# Altium PCB Camera-MT_Pcb.PcbDoc
Units mil, origin at the board's own origin, x right, y up, seen from the top; angles counter-clockwise.
Board outline 860 x 1080 mil, 2 copper layers (Top Layer, Bottom Layer); 19 components, 29 nets, 100 pads, 34 vias.
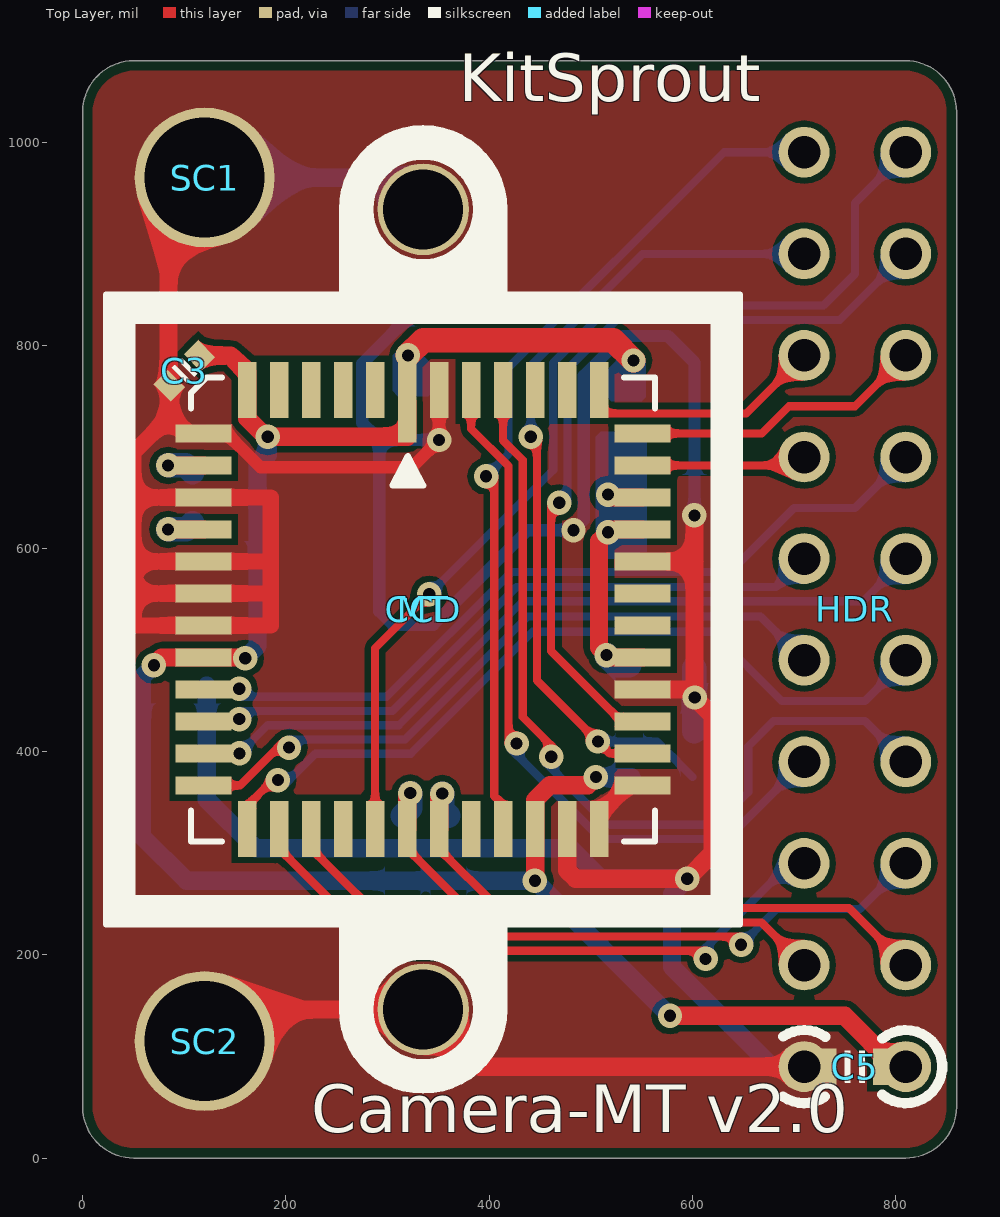
[diagram p0: Top Layer view]
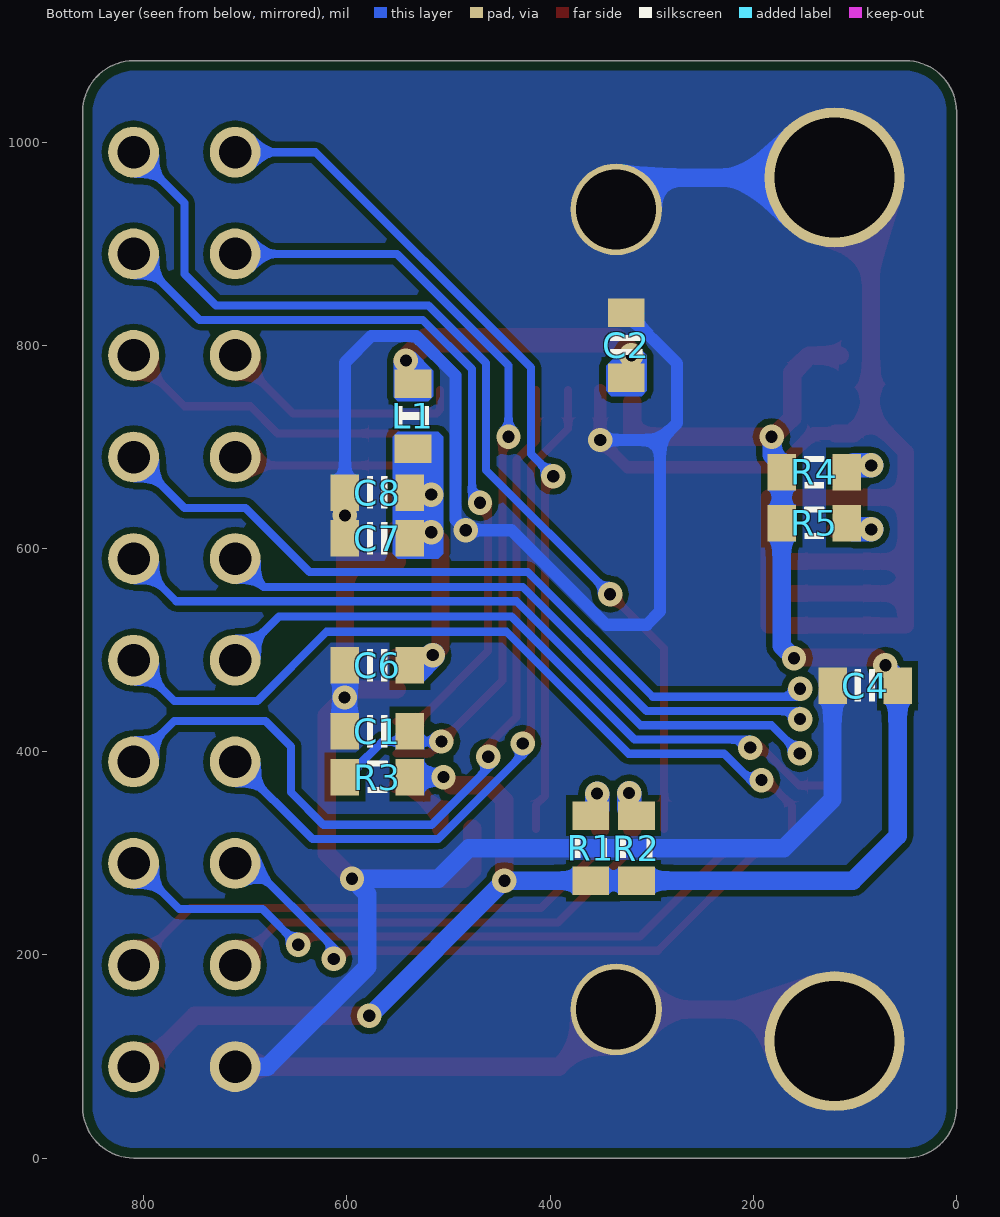
[diagram p1: Bottom Layer view, seen from below]
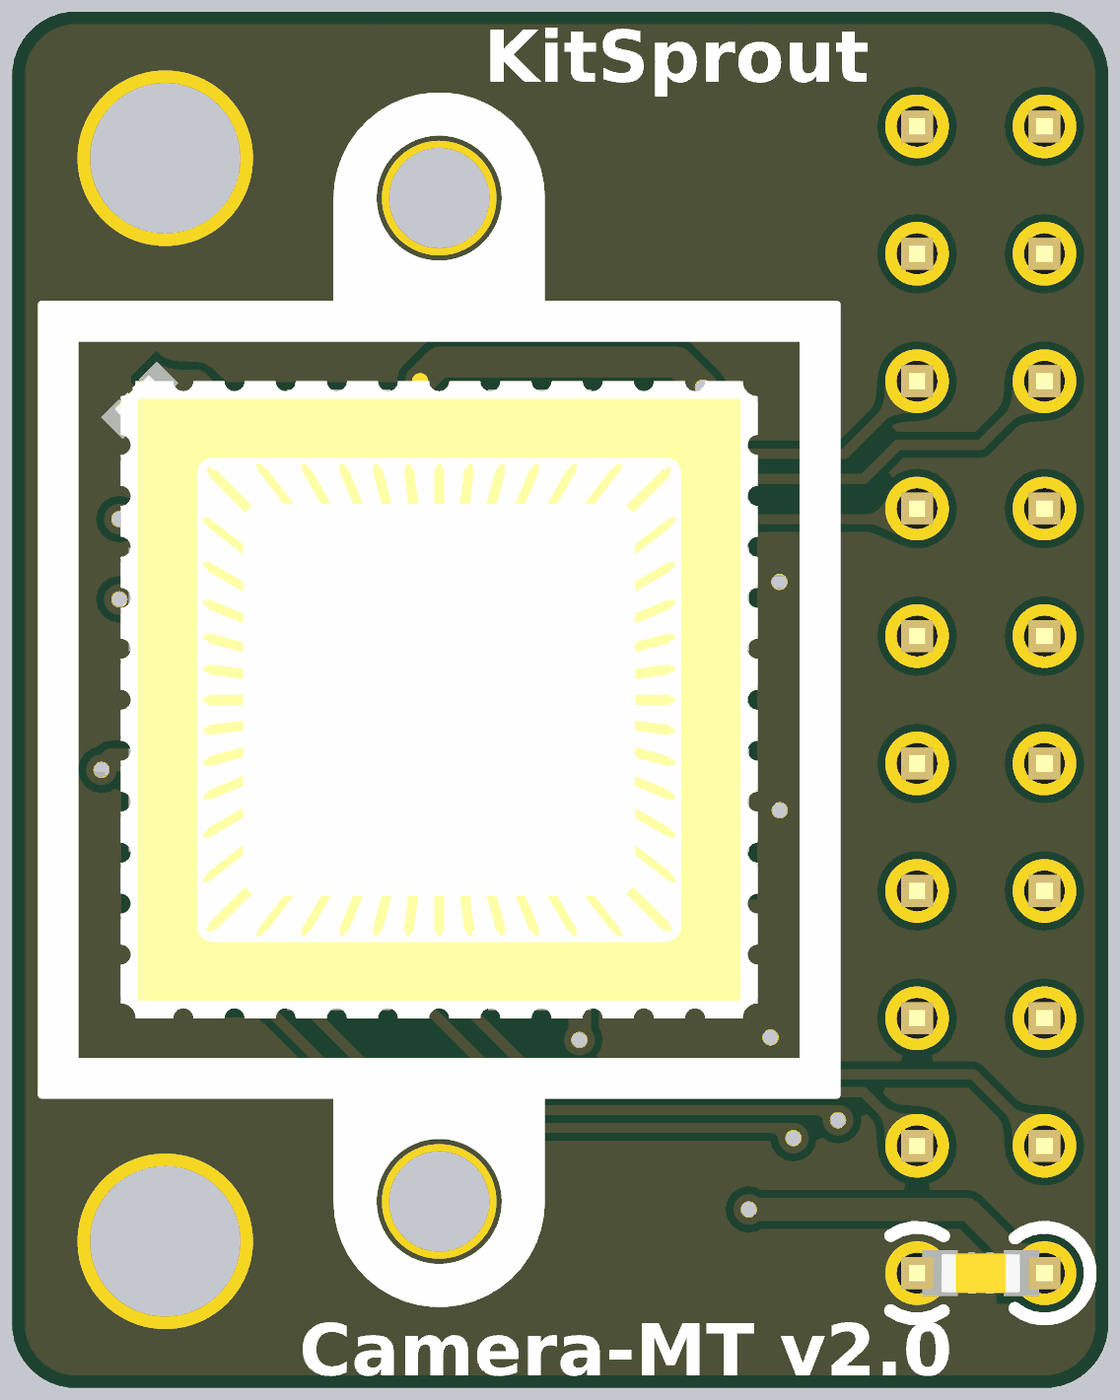
[diagram p2: 3D render of the assembled board from above, using the file's embedded part models]
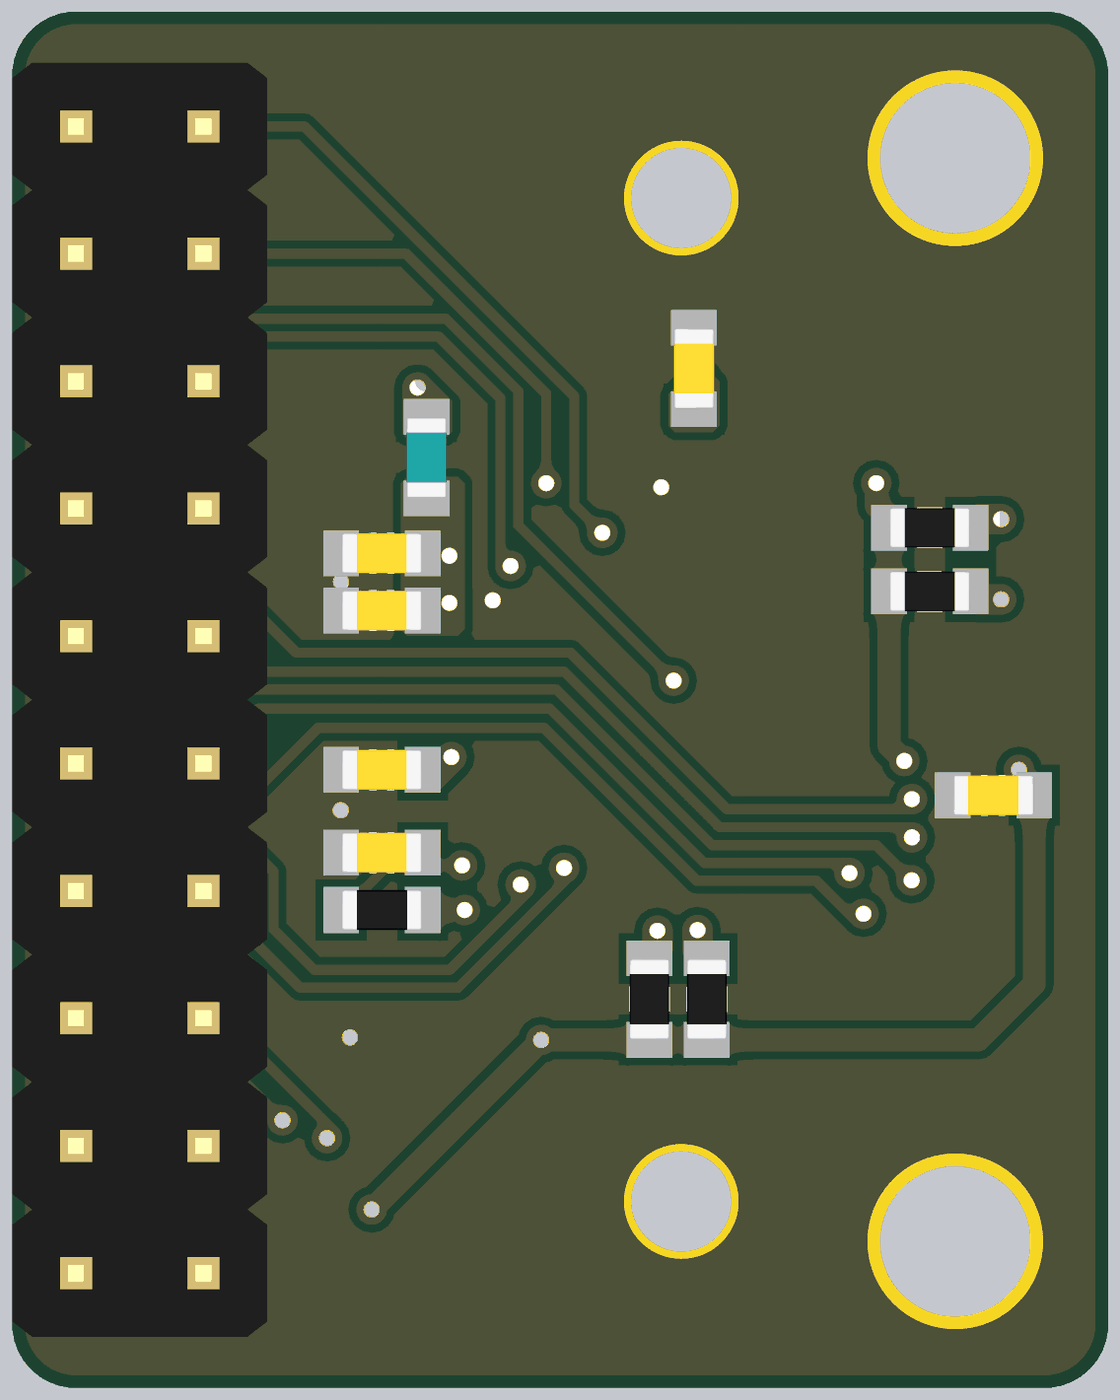
[diagram p3: 3D render of the assembled board from below, using the file's embedded part models]

## Layer stack, top to bottom
Top Solder: solder mask 0.4, Solder Resist, Dk 3.5
Top Layer: signal copper 1.4
Dielectric1: dielectric 12.6, FR-4, Dk 4.8
Bottom Layer: signal copper 1.4
Bottom Solder: solder mask 0.4, Solder Resist, Dk 3.5

## Board outline
0,50 0,1030 cw(c50,1030) 50,1080 810,1080 cw(c810,1030) 860,1030 860,50 cw(c810,50) 810,0 50,0 cw(c50,50)

## Design rules (kind name [scope] priority, off if disabled: settings)
Clearance ClearancePolygon [InPolygon] p1: gap=6
Clearance [All] p2: gap=6
ComponentClearance [All] p1: gap=0 collisioncheckmode=3 verticalgap=0 showdistances=FALSE
Height [All] p1: minheight=0 maxheight=5000 prefheight=500
HoleToHoleClearance [All] p1: gap=6 allowstackedmicrovias=TRUE
MinimumSolderMaskSliver [All] p1: minsoldermaskwidth=6
PlaneConnect [All] p1: planeconnectstyle=Direct reliefexpansion=20 reliefentries=4 reliefconductorwidth=20 reliefairgap=10
PolygonConnect [All] p1: connectstyle=Direct reliefconductorwidth=20 reliefentries=4 polygonreliefangle="90 Angle" airgapwidth=10
RoutingVias [All] p1: holewidth=12 width=20 viastyle="Through Hole" minholewidth=12 minwidth=20 maxholewidth=100 maxwidth=200
SilkToSilkClearance [All] p1: silktosilkclearance=0
SilkToSolderMaskClearance SilkscreenOverComponentPads [IsPad] p1: minsilkscreentomaskgap=1 clearancetoexposedcopper=TRUE
SolderMaskExpansion [All] p1: expansion=0
Width [All] p1: maxlimit=30 minlimit=6 preferedwidth=10
23 further rules are at their usual default settings.

## Components (designator, comment, footprint, x,y, rotation, side; value= is the part's Value field where it differs from the comment)
C1 "Cap_0603" CAP_0603 570,420 r180 bottom
C2 "Cap_0603" CAP_0603 325,800 r270 bottom
C3 "Cap_0402" CAP_0402 100,775 r45 top
C4 "Cap_0603" CAP_0603 90,465 r180 bottom
C5 "Cap_0603" CAP_0603 760,90 r0 top
C6 "Cap_0603" CAP_0603 570,485 r180 bottom
C7 "Cap_0603" CAP_0603 570,610 r180 bottom
C8 "Cap_0603" CAP_0603 570,655 r180 bottom
CCD "CCD" CCD_LENS_20MM 335,540 r90 top locked
HDR "HDR2x10_2.54" HDR2X10_2.54_180 810,90 r180 top locked
L1 "Ind_0603" IND_0603 535,730 r270 bottom
MT "MT9V034" CLCC_48 335,540 r0 top locked
R1 "Res_0603" RES_0603 360,305 r270 bottom
R2 "Res_0603" RES_0603 315,305 r270 bottom
R3 "Res_0603" RES_0603 570,375 r180 bottom
R4 "Res_0603" RES_0603 140,675 r0 bottom
R5 "Res_0603" RES_0603 140,625 r0 bottom
SC1 "M3" SCRREW_M3 120,965 r0 top locked
SC2 "M3" SCRREW_M3 120,115 r0 top locked

## Footprints (in the part's own frame and the unit in brackets; to place one, negate y for a bottom-side part, rotate by r counter-clockwise, add the part's x,y. Pads: shape width x height; smd on the part's side, far side on the other; paste and mask are expansions set on the pad)
CAP_0402 [mil]
  rect 20x24 smd: 1(-21,0) 2(21,0)
  silkscreen extent -7,-10 7,10, body extent -20,-10 20,10, height 22
CAP_0603 [mil]
  rect 28x36 smd: 1(-32,0) 2(32,0)
  silkscreen extent -10,-16 10,16, body extent -31,-16 31,16, height 36
CCD_LENS_20MM [mil]
  round 90 hole 78.74 mask+0: 0(-393.7,0) 0(393.7,0)
  silkscreen extent -474,-312 474,312
CLCC_48 [mil]
  rect 18x79 smd: 1(-15.75,204)
  rect 18x55 smd: 2(-47.24,216) 3(-78.74,216) 4(-110.24,216) 5(-141.73,216) 6(-173.23,216) 19(-173.23,-216) 20(-141.73,-216) 21(-110.24,-216) 22(-78.74,-216) 23(-47.24,-216) 24(-15.75,-216) 25(15.75,-216) 26(47.24,-216) 27(78.74,-216) 28(110.24,-216) 29(141.73,-216) 30(173.23,-216) 43(173.23,216) 44(141.73,216) 45(110.24,216) 46(78.74,216) 47(47.24,216) 48(15.75,216)
  rect 55x18 smd: 7(-216,173.23) 8(-216,141.73) 9(-216,110.24) 10(-216,78.74) 11(-216,47.24) 12(-216,15.75) 13(-216,-15.75) 14(-216,-47.24) 15(-216,-78.74) 16(-216,-110.24) 17(-216,-141.73) 18(-216,-173.23) 31(216,-173.23) 32(216,-141.73) 33(216,-110.24) 34(216,-78.74) 35(216,-47.24) 36(216,-15.75) 37(216,15.75) 38(216,47.24) 39(216,78.74) 40(216,110.24) 41(216,141.73) 42(216,173.23)
  silkscreen extent -228,-228 228,228, body extent -250,-250 250,250, height 80
HDR2X10_2.54_180 [mil]
  round 50 hole 32: 1(0,0) 2(100,0) 3(0,-100) 4(100,-100) 5(0,-200) 6(100,-200) 7(0,-300) 8(100,-300) 9(0,-400) 10(100,-400) 11(0,-500) 12(100,-500) 13(0,-600) 14(100,-600) 15(0,-700) 16(100,-700) 17(0,-800) 18(100,-800) 19(0,-900) 20(100,-900)
  body extent -50,-950 150,50, height 108
IND_0603 [mil]
  rect 28x36 smd: 1(-32,0) 2(32,0)
  silkscreen extent -10,-16 10,16, body extent -31,-16 31,16, height 37
RES_0603 [mil]
  rect 28x36 smd: 1(-32,0) 2(32,0)
  silkscreen extent -10,-16 10,16, body extent -31,-16 32,16, height 20
SCRREW_M3 [mm]
  round 3.5 hole 3 mask+0: 0(0,0)

## Part data
C1 C2 C3 C4 C5 C6 C7 C8: "Capacitor"
CCD: library part lensCCD_20
HDR: "Header"
L1: "Inductor"
MT: "CMOS"
R1 R2 R3 R4 R5: "Resistor"
SC1 SC2: library part Screw_M3, "Screw"

## Via types
v1: diameter 24, hole 12, Top Layer to Bottom Layer, 34 vias

## Nets (pads, with @x,y where several pads share a name; then routed paths per layer and width w, separated by ;. In a path a pad name is that pad's centre, name@x,y a point inside that pad or via, vN(x,y) a via of type N, cw(c..) or ccw(c..) an arc to the next point about the centre after c; other vN are vias at no path point)
3V3: C2.2 C3.2 C4.2 C5.2 HDR.1 L1.1 MT.1 MT.6 MT.14 MT.28 R1.2 R2.2 R3.2 R4.2 R5.2 | length 2061.1
  Top Layer w18: v1(70,485) 77.76,492.76 v1@152.76,492.76 ; C3.2 145.15,789.85 161.77,773.23 MT.6 161.77,728.23 180,710 319.25,710 MT.1 ; v1@445.24,273 MT.28 445.24,352.24 460,367 497,367 v1(505,375) ; v1(578,140) 750,140 HDR.1@815,75
  Top Layer w24: v1(320,790) 335,805 522,805 v1(542,785)
  Bottom Layer w18: v1(70,485) 58,473 58,317 102,273 R2.2 R1.2 v1(445,273) v1(578,140) ; v1(160,492) 172,504 172,682 182,692 v1(182,710) ; v1(505,375) R3.2@540,375
3V3A: C6.2 C7.2 C8.2 L1.2 MT.35 MT.39 MT.40 | length 261.2
  Top Layer w18: v1(517,653) 519.76,650.24 MT.40 ; MT.35 517.71,492.76 v1(515.46,495) 508,502.46 508,607 v1(517,616) 519.74,618.74 MT.39
  Bottom Layer w24: v1(515.46,495) 525.46,485 C6.2
COUT_N: MT.2
COUT_P: MT.3
D0: MT.45
D1: MT.44
D2: HDR.16 MT.43 | length 246.2
  Top Layer w8: MT.43 508.23,736.77 512,733 653,733 HDR.16
D3: HDR.15 MT.42 | length 290.8
  Top Layer w8: MT.42 668.23,713.23 695,740 760,740 HDR.15
D4: HDR.14 MT.41 | length 162.4
  Top Layer w8: MT.41 701.73,681.73 HDR.14
D5: HDR.13 MT.15 | length 753.8
  Bottom Layer w8: v1@154,454 299,454 422,577 637,577 700,640 760,640 HDR.13
  other v1: 154,462
D6: HDR.12 MT.16 | length 618.1
  Bottom Layer w8: v1@154,440 305,440 427,562 682,562 HDR.12
  other v1: 154,432
D7: HDR.11 MT.17 | length 735.2
  Bottom Layer w8: v1(154.27,398.27) 182,426 311,426 433,548 768,548 HDR.11
D8: HDR.10 MT.18 | length 671.8
  Top Layer w8: MT.18 154.77,366.77 v1@198,410
  Bottom Layer w8: v1@203,412 317,412 438,533 667,533 HDR.10
  other v1: 203,404
D9: HDR.9 MT.19 | length 778.4
  Top Layer w8: MT.19 161.77,346.77 v1@187,372
  Bottom Layer w8: v1@197.5,366.5 229,398 322.8,398 442.8,518 620,518 688,450 770,450 HDR.9
  other v1: 192,372
DOUT_N: MT.5
DOUT_P: MT.4
EXP: HDR.19 MT.23 | length 1005
  Top Layer w8: MT.23 287.76,501.76 v1(341,555)
  Bottom Layer w8: v1(341,555) 463,677 463,782.4 519.6,839 729,839 760,870 760,940 HDR.19
GND: C1.1 C2.1 C3.1 C4.1 C5.1 C6.1 C7.1 C8.1 CCD.0 HDR.2 MT.7 MT.9 MT.11 MT.12 MT.13 MT.29 MT.30 MT.31 MT.34 MT.38 MT.48 SC1.0 SC2.0 | length 5072.5
  Top Layer w12: MT.7 141.77,713.23 175,680 324,680 v1(350.75,706.75) MT.48
  Top Layer w16: 50,555.75 184.76,555.75 ; 50,587.24 184.76,587.24 ; 85.15,729.85 50,694.7 50,650.24 ; MT.30 508.23,338.23 536.77,366.77 MT.31 ; 50,650.24 MT.9 185,650.24 185,524.25 50,524.25 50,650.24
  Top Layer w18: MT.7 101.77,713.23 85.15,729.85 C3.1 84.29,761.01 84.29,929.29 SC1.0 ; SC2.0 151.3,146.3 335,146.3 391.3,90 HDR.2 ; MT.29 476.73,283.27 485,275 v1(595,275) 620,300 620,435.52 v1(602.26,453.26) v1@602,453.52 ; MT.34 594.26,461.26 v1@602,453.52 ; MT.38 602,587.24 ; v1@602,453.26 v1@602,453.52 ; v1(602,632.5) 602,587.24 ; v1@602,453.52 602,587.24
  Bottom Layer w12: C2.1 275,782 275,723.5 291.75,706.75 ; v1(350.75,706.75) 291.75,706.75 ; C7.1 v1(602,632.5) C8.1 602,783 576,809 532.03,809 493,769.97 493,628 v1(483,618) 438,618 345,525 305,525 291.75,538.25 291.75,706.75
  Bottom Layer w18: SC1.0 303.7,965 CCD.0@335,933.7 ; C4.1 122,353 170,305 480,305 510,275 v1(595,275) 580,260 580,188.18 678.18,90 HDR.2
  Bottom Layer w24: C1.1 C6.1@602,482
HSYNC: HDR.6 MT.20 | length 597.3
  Top Layer w8: MT.20@193.27,304.85 294.12,204 v1@613,204
  Bottom Layer w8: v1@607,201 HDR.6@703,297
  other v1: 613,196
LED: HDR.20 MT.27 | length 845.5
  Top Layer w8: v1@405,671 405,356.48 413.74,347.74 MT.27
  Bottom Layer w8: v1(397,671) 419,693 419,777.99 631.01,990 HDR.20
NetMT_8: MT.8 R4.1 | length 61.8
  Top Layer w18: v1(84,681.73) MT.8
  Bottom Layer w24: v1(84,681.73) 101.27,681.73 R4.1
NetMT_10: MT.10 R5.1 | length 61.6
  Top Layer w18: v1(84,618.74) MT.10
  Bottom Layer w24: v1(84,618.74) 101.74,618.74 R5.1
PCLK: HDR.7 MT.46 | length 844
  Top Layer w8: MT.46 413.74,706.15 433,686.89 433,434 v1@467,400
  Bottom Layer w8: v1@454.93,389.93 516.86,328 623,328 655,360 655,405 680,430 770,430 HDR.7
  other v1: 461,395
RST: C1.2 HDR.18 MT.32 R3.1 | length 866.9
  Top Layer w8: v1@447,711 447,470 v1(507,410) 518.73,398.27 MT.32
  Bottom Layer w8: v1(441,710) 441,780.2 550.8,890 HDR.18 ; v1(507,410) 565,410 R3.1@600,375
SCL: HDR.3 MT.25 R1.1 | length 566.9
  Top Layer w8: MT.25@350.75,304.25 409,246 754,246 HDR.3
  Top Layer w18: MT.25 350.75,355.75 v1(353.75,358.75)
  Bottom Layer w24: v1(353.75,358.75) 353.75,343.25 R1.1
SDA: HDR.4 MT.24 R2.1 | length 500.1
  Top Layer w8: MT.24@319.25,304.85 392.11,232 668,232 HDR.4
  Top Layer w18: MT.24 319.25,356.25 v1(322.25,359.25)
  Bottom Layer w24: R2.1 322.25,344.25 v1(322.25,359.25)
STB: HDR.17 MT.33 | length 774.2
  Top Layer w8: v1@461,645 461,499 530.24,429.76 MT.33
  Bottom Layer w8: v1@477,647 477,776.6 525.4,825 745,825 HDR.17
  other v1: 469,645
VSYNC: HDR.5 MT.21 | length 654.3
  Top Layer w8: MT.21@224.76,304.85 311.62,218 v1@647.93,218
  Bottom Layer w8: v1(648,210) 683,245 765,245 HDR.5
XCLK: HDR.8 MT.47 | length 720.5
  Top Layer w8: MT.47 382.24,717.84 419,681.09 v1@419,408
  Bottom Layer w8: v1@421.06,403.06 510.11,314 634,314 HDR.8
  other v1: 427,408
pads on no net: MT.22 MT.26 MT.36 MT.37

## Polygon pours and split planes (outlines as drawn)
GND on Top Layer "Top Layer-No Net" (solid, remove dead copper, pour order 1): 50,1070 ccw(c50,1030) 10,1030 10,50 ccw(c50,50) 50,10 810,10 ccw(c810,50) 850,50 850,1030 ccw(c810,1030) 810,1070
GND on Bottom Layer "Top Layer-No Net" (solid, remove dead copper, pour order 3): 50,1070 ccw(c50,1030) 10,1030 10,50 ccw(c50,50) 50,10 810,10 ccw(c810,50) 850,50 850,1030 ccw(c810,1030) 810,1070

## Other copper
Bottom Layer:
  region net 3V3A: 510,715 550,715 555,710 555,666.13 555,595 550,590 510,590 505,595 505,710
  region net 3V3: 310,750 305,755 305,790 315,800 325,800 345,780 345,755 340,750
  region net 3V3: 554,749 550,745 520,745 515,750 515,775 533.5,793.5 542,785 554,785

## Silkscreen, mask and mechanical layers (free items; w line width, h text height)
Top Overlay:
  lines w10: 689.17,60.64 ccw(c710,90) 730.64,60.51 ; 689.36,119.49 cw(c710,90) 730.83,119.36 ; 786.86,62.42 ccw(c810,90) 786.86,117.58
  text "KitSprout" at 370,1025 h80
  text "Camera-MT v2.0" at 225,10 h80
Mechanical 1:
  the board outline again, w2